# EAGLE board LEDARRAY (EAGLE 8.6.0)

Size 163.68 x 171.95 mm. Coordinates in mm from the lower left corner, seen from the top.
Outline: 41,35.3 85,84.3 85,153.3
Outline: 85,153.3 138,142.3 163.68,171.95
Outline: 85,153.3 0,153.3 0,84.3 41,35.3
Outline: 41,35.3 120.7,0
Copper layers (1*16): Top 0.035mm / dielectric 1.5mm / Bottom 0.035mm
Design rules "default *": minimum track width 0.5mm, minimum drill 0.5mm, track to track 0.8mm, track to pad 0.8mm, pad to pad 0.6mm, via to via 2mm, smd to smd 1mm, copper to edge 40mil, drill to drill 6mil, minimum pad ring 10mil, minimum via ring 8mil, stop-mask expansion 4mil, vias tented up to drill 0mil, thermal gap 10mil

## Footprints (pad centres in the part's own frame; a part is rotated, then mirrored left to right if it is on the bottom)
LED_3MM = drill 0.813 pad 1.88: A -1.27,0; K 1.27,0
DIP28 = drill 0.813 pad 1.626: 1 -16.51,-3.81; 2 -13.97,-3.81; 3 -11.43,-3.81; 4 -8.89,-3.81; 5 -6.35,-3.81; 6 -3.81,-3.81; 7 -1.27,-3.81; 8 1.27,-3.81; 9 3.81,-3.81; 10 6.35,-3.81; 11 8.89,-3.81; 12 11.43,-3.81; 13 13.97,-3.81; 14 16.51,-3.81; 15 16.51,3.81; 16 13.97,3.81; 17 11.43,3.81; 18 8.89,3.81; 19 6.35,3.81; 20 3.81,3.81; 21 1.27,3.81; 22 -1.27,3.81; 23 -3.81,3.81; 24 -6.35,3.81; 25 -8.89,3.81; 26 -11.43,3.81; 27 -13.97,3.81; 28 -16.51,3.81

## Placement (x,y rotation side)
16MHZ  [LED_3MM]  55.2,70.42 90 top
C1  [LED_3MM]  51.2,58.26 90 top
C2  [LED_3MM]  51.2,65.34 90 top
LEDA1  [LED_3MM]  14,140.3 0 top
LEDA2  [LED_3MM]  19,138.3 0 top
LEDA3  [LED_3MM]  23.83,135.42 0 top
LEDA4  [LED_3MM]  28.91,132.42 0 top
LEDA5  [LED_3MM]  51.99,132.42 0 top
LEDA6  [LED_3MM]  57.07,135.42 0 top
LEDA7  [LED_3MM]  62,138.3 0 top
LEDA8  [LED_3MM]  67,141.3 0 top
LEDB1  [LED_3MM]  14,134.3 0 top
LEDB2  [LED_3MM]  18.75,131.34 0 top
LEDB3  [LED_3MM]  23.83,129.34 0 top
LEDB4  [LED_3MM]  28.91,126.34 0 top
LEDB5  [LED_3MM]  51.99,126.34 0 top
LEDB6  [LED_3MM]  57.07,129.34 0 top
LEDB7  [LED_3MM]  62.15,132.34 0 top
LEDB8  [LED_3MM]  67,135.3 0 top
LEDC1  [LED_3MM]  13.67,128.26 0 top
LEDC2  [LED_3MM]  18.75,125.26 0 top
LEDC3  [LED_3MM]  23.83,123.26 0 top
LEDC4  [LED_3MM]  28.91,120.26 0 top
LEDC5  [LED_3MM]  51.99,120.26 0 top
LEDC6  [LED_3MM]  57.07,123.26 0 top
LEDC7  [LED_3MM]  62.15,126.26 0 top
LEDC8  [LED_3MM]  67.23,129.26 0 top
LEDD1  [LED_3MM]  13.67,122.18 0 top
LEDD2  [LED_3MM]  18.75,119.18 0 top
LEDD3  [LED_3MM]  23.83,116.18 0 top
LEDD4  [LED_3MM]  28.91,113.18 0 top
LEDD5  [LED_3MM]  51.99,113.18 0 top
LEDD6  [LED_3MM]  57.07,117.18 0 top
LEDD7  [LED_3MM]  62.15,120.18 0 top
LEDD8  [LED_3MM]  67.23,123.18 0 top
LEDE1  [LED_3MM]  13.67,116.1 0 top
LEDE2  [LED_3MM]  18.75,113.1 0 top
LEDE3  [LED_3MM]  23.83,110.1 0 top
LEDE4  [LED_3MM]  28.91,107.1 0 top
LEDE5  [LED_3MM]  51.99,107.1 0 top
LEDE6  [LED_3MM]  57.07,110.1 0 top
LEDE7  [LED_3MM]  62.15,113.1 0 top
LEDE8  [LED_3MM]  67.23,117.1 0 top
LEDF1  [LED_3MM]  13.67,110.02 0 top
LEDF2  [LED_3MM]  18.75,107.02 0 top
LEDF3  [LED_3MM]  23.83,104.02 0 top
LEDF4  [LED_3MM]  28.91,100.02 0 top
LEDF5  [LED_3MM]  51.99,100.02 0 top
LEDF6  [LED_3MM]  57.07,104.02 0 top
LEDF7  [LED_3MM]  62.15,107.02 0 top
LEDF8  [LED_3MM]  67.23,111.02 0 top
LEDG1  [LED_3MM]  14,104.3 0 top
LEDG2  [LED_3MM]  18.75,100.94 0 top
LEDG3  [LED_3MM]  23.83,96.94 0 top
LEDG4  [LED_3MM]  28.91,93.94 0 top
LEDG5  [LED_3MM]  51.99,93.94 0 top
LEDG6  [LED_3MM]  57.07,96.94 0 top
LEDG7  [LED_3MM]  62.15,100.94 0 top
LEDG8  [LED_3MM]  67,104.3 0 top
LEDH1  [LED_3MM]  14,98.3 0 top
LEDH2  [LED_3MM]  19,94.3 0 top
LEDH3  [LED_3MM]  23.83,90.86 0 top
LEDH4  [LED_3MM]  28.91,86.86 0 top
LEDH5  [LED_3MM]  51.99,86.86 0 top
LEDH6  [LED_3MM]  57.07,89.86 0 top
LEDH7  [LED_3MM]  62,94.3 0 top
LEDH8  [LED_3MM]  67,97.3 0 top
PLANTINPUTS  [LED_3MM]  77.67,90.89 90 top
POWERSUPPLY  [LED_3MM]  31.2,57.81 90 top
R1  [LED_3MM]  6.12,88.42 90 top
R2  [LED_3MM]  12.12,84.34 90 top
R3  [LED_3MM]  17.12,79.26 90 top
R4  [LED_3MM]  26.12,70.18 90 top
R5  [LED_3MM]  31.12,65.1 90 top
R6  [LED_3MM]  61.12,75.02 90 top
R7  [LED_3MM]  66.12,79.94 90 top
R8  [LED_3MM]  72.12,85.86 90 top
R9  [LED_3MM]  21.67,74.81 90 top
U1  328P  [DIP28]  40.8,73.35 270 top

## Library data of the parts
16MHZ C1 C2 LEDA1-LEDA8 LEDB1-LEDB8 LEDC1-LEDC8 LEDD1-LEDD8 LEDE1-LEDE8 LEDF1-LEDF8 LEDG1-LEDG8 LEDH1-LEDH8 PLANTINPUTS POWERSUPPLY R1-R9 = SparkFun-LED; PROD_ID: DIO-08794
U1 = SparkFun-IC-Microcontroller; PROD_ID: IC-09136

## Nets
LEDD1: LEDA1.K LEDB1.K LEDC1.K LEDD1.K LEDE1.K LEDF1.K LEDG1.K LEDH1.K U1.16
N$1: R8.A U1.15
N$2: LEDG1.A LEDG2.A LEDG3.A LEDG4.A LEDG5.A LEDG6.A LEDG7.A LEDG8.A R7.K
N$3: LEDF1.A LEDF2.A LEDF3.A LEDF4.A LEDF5.A LEDF6.A LEDF7.A LEDF8.A R6.K
N$4: LEDH1.A LEDH2.A LEDH3.A LEDH4.A LEDH5.A LEDH6.A LEDH7.A LEDH8.A R8.K
N$5: LEDD1.A LEDD2.A LEDD3.A LEDD4.A LEDD5.A LEDD6.A LEDD7.A LEDD8.A R4.K
N$6: LEDE1.A LEDE2.A LEDE3.A LEDE4.A LEDE5.A LEDE6.A LEDE7.A LEDE8.A R5.K
N$7: R6.A U1.13
N$8: LEDA6.K LEDB6.K LEDC6.K LEDD6.K LEDE6.K LEDF6.K LEDG6.K LEDH6.K U1.25
N$9: LEDA2.K LEDB2.K LEDC2.K LEDD2.K LEDE2.K LEDF2.K LEDG2.K LEDH2.K U1.17
N$10: R7.A U1.14
N$11: LEDA3.K LEDB3.K LEDC3.K LEDD3.K LEDE3.K LEDF3.K LEDG3.K LEDH3.K U1.18
N$12: LEDB1.A LEDB2.A LEDB3.A LEDB4.A LEDB5.A LEDB6.A LEDB7.A LEDB8.A R2.K
N$13: PLANTINPUTS.A U1.23
N$14: LEDA5.K LEDB5.K LEDC5.K LEDD5.K LEDE5.K LEDF5.K LEDG5.K LEDH5.K U1.24
N$16: 16MHZ.K C1.K U1.9
N$17: R9.A U1.1
N$18: R5.A U1.12
N$19: R4.A U1.11
N$20: LEDA7.K LEDB7.K LEDC7.K LEDD7.K LEDE7.K LEDF7.K LEDG7.K LEDH7.K U1.26
N$21: LEDC1.A LEDC2.A LEDC3.A LEDC4.A LEDC5.A LEDC6.A LEDC7.A LEDC8.A R3.K
N$22: LEDA8.K LEDB8.K LEDC8.K LEDD8.K LEDE8.K LEDF8.K LEDG8.K LEDH8.K U1.27
N$23: R2.A U1.5
N$24: R1.A U1.4
N$25: PLANTINPUTS.K U1.28
N$26: POWERSUPPLY.K R9.K U1.7 U1.20
N$27: LEDA4.K LEDB4.K LEDC4.K LEDD4.K LEDE4.K LEDF4.K LEDG4.K LEDH4.K U1.19
N$28: 16MHZ.A C2.K U1.10
N$30: R3.A U1.6
N$32: LEDA1.A LEDA2.A LEDA3.A LEDA4.A LEDA5.A LEDA6.A LEDA7.A LEDA8.A R1.K
POWERSUPPLY: C1.A C2.A POWERSUPPLY.A U1.8 U1.22

## Tracks (layer width: path | path; a pad name or v marks a point on that pad's centre or on a via)
LEDD1  (8 unrouted)
N$1  (1 unrouted)
N$2  (8 unrouted)
N$3  (8 unrouted)
N$4  (8 unrouted)
N$5  (8 unrouted)
N$6  (8 unrouted)
N$7  (1 unrouted)
N$8  (8 unrouted)
N$9  (8 unrouted)
N$10  (1 unrouted)
N$11  (8 unrouted)
N$12  (8 unrouted)
N$13  (1 unrouted)
N$14  (8 unrouted)
N$16  (2 unrouted)
N$17  (1 unrouted)
N$18  (1 unrouted)
N$19  (1 unrouted)
N$20  (8 unrouted)
N$21  (8 unrouted)
N$22  (8 unrouted)
N$23  (1 unrouted)
N$24  (1 unrouted)
N$25  (1 unrouted)
N$26  (3 unrouted)
N$27  (8 unrouted)
N$28  (2 unrouted)
N$30  (1 unrouted)
N$32  (8 unrouted)
POWERSUPPLY  (4 unrouted)